# Altium PCB MODULE_DRIVER.PcbDoc (part 1 of 2)
Units mil, origin at the board's own origin, x right, y up, seen from the top; angles counter-clockwise.
Board outline 3897.64 x 6754.13 mil, 4 copper layers (TOP, GND, POWER, BOTTOM), stack 23.756 mil thick; 214 components, 85 nets, 571 pads, 350 vias.
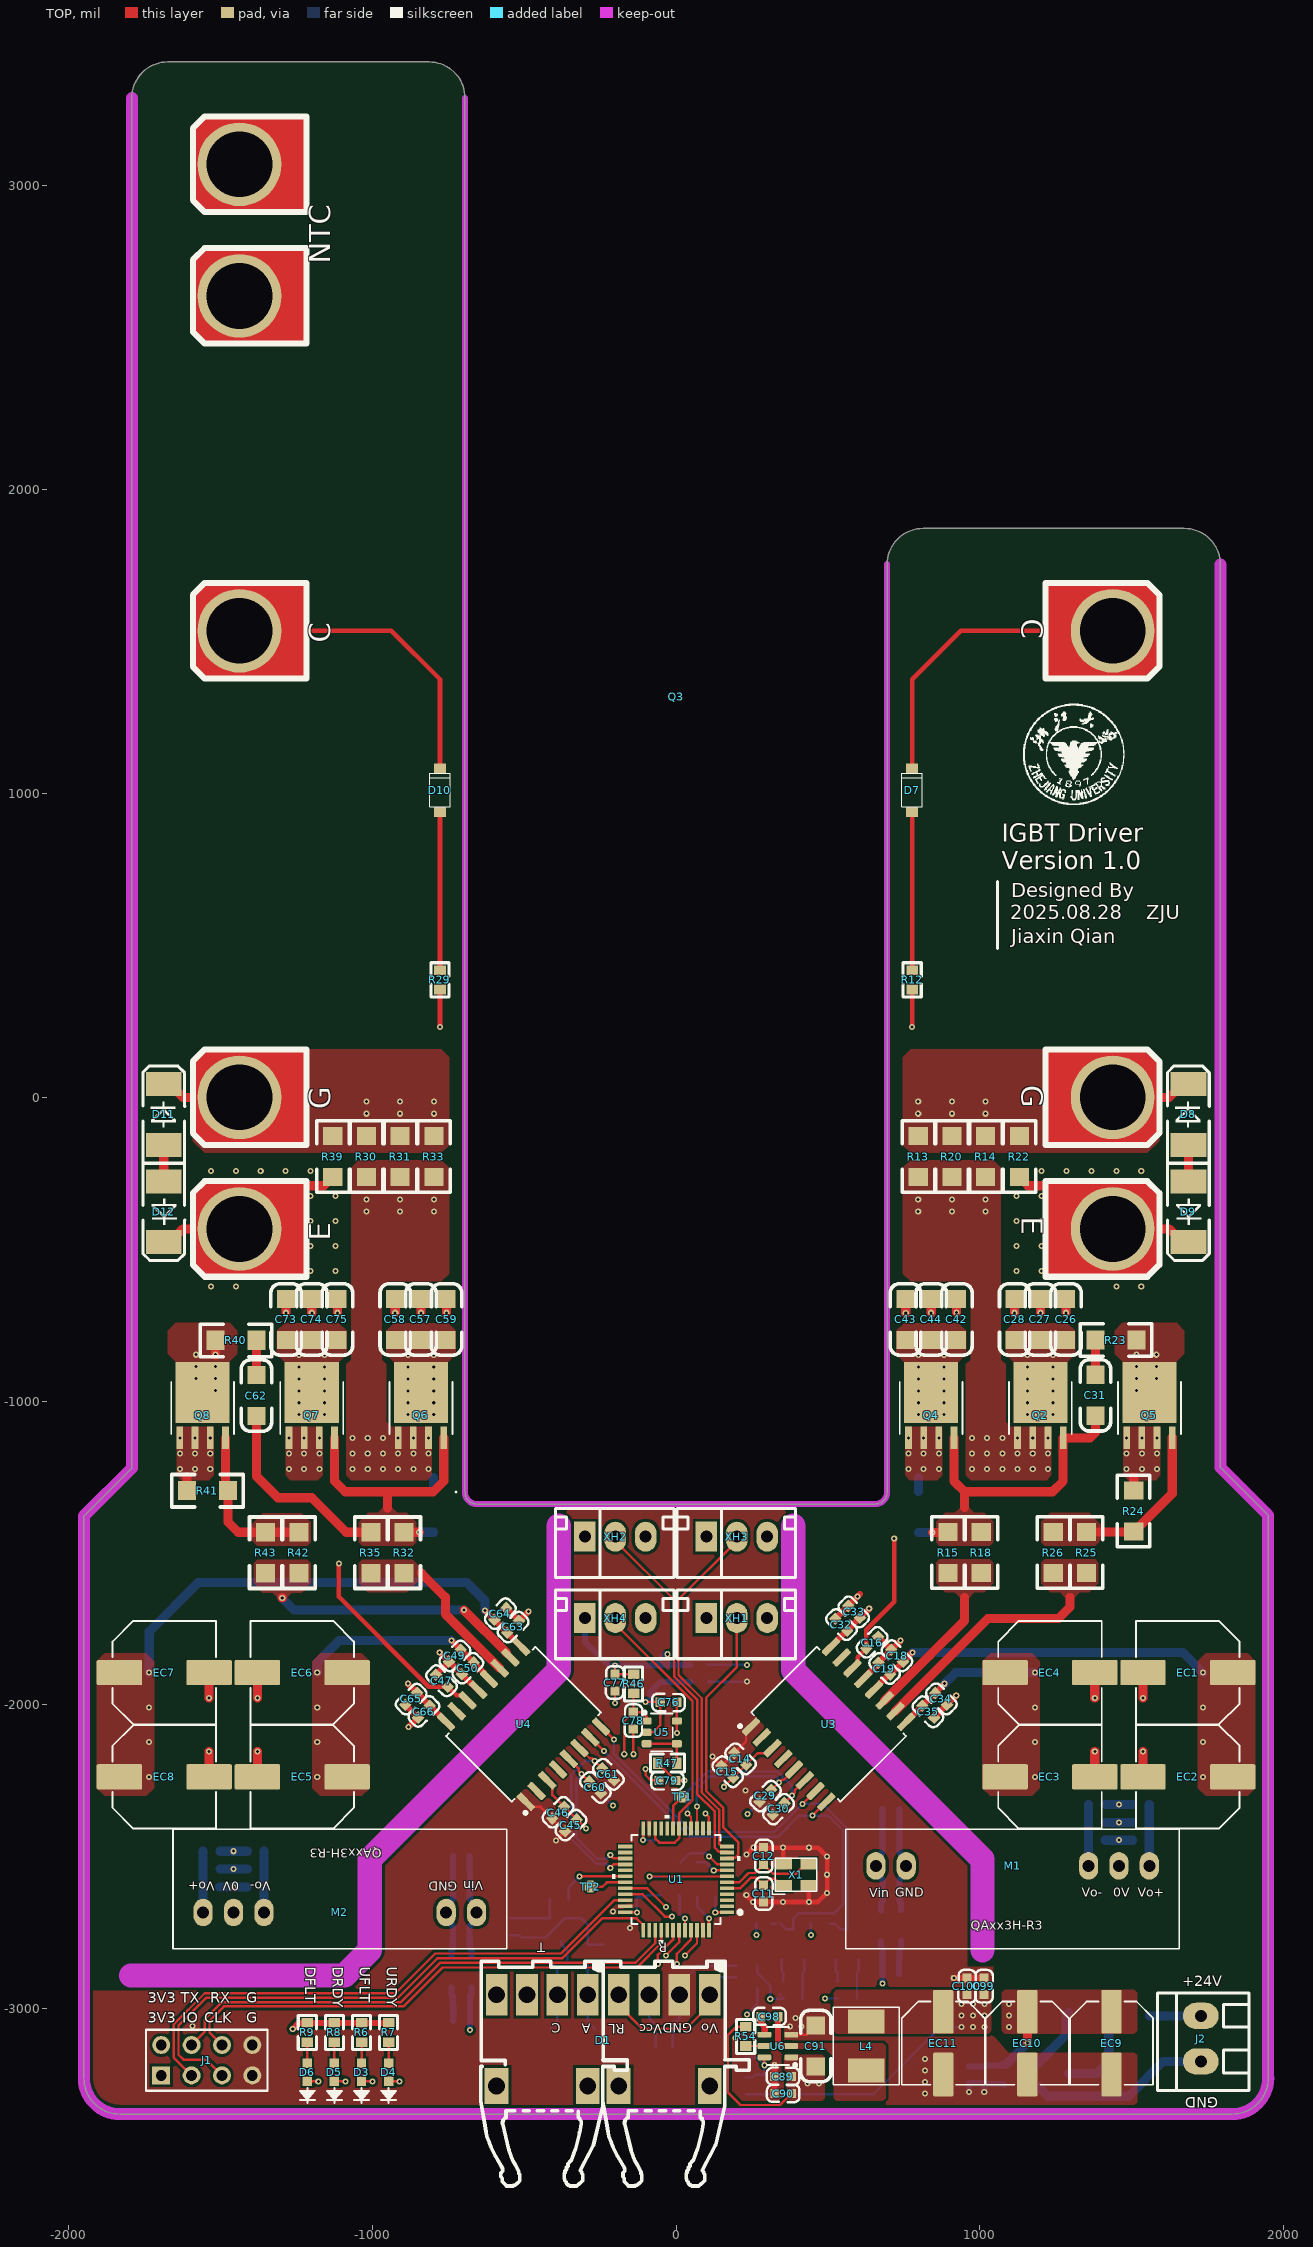
[diagram p0: TOP view]
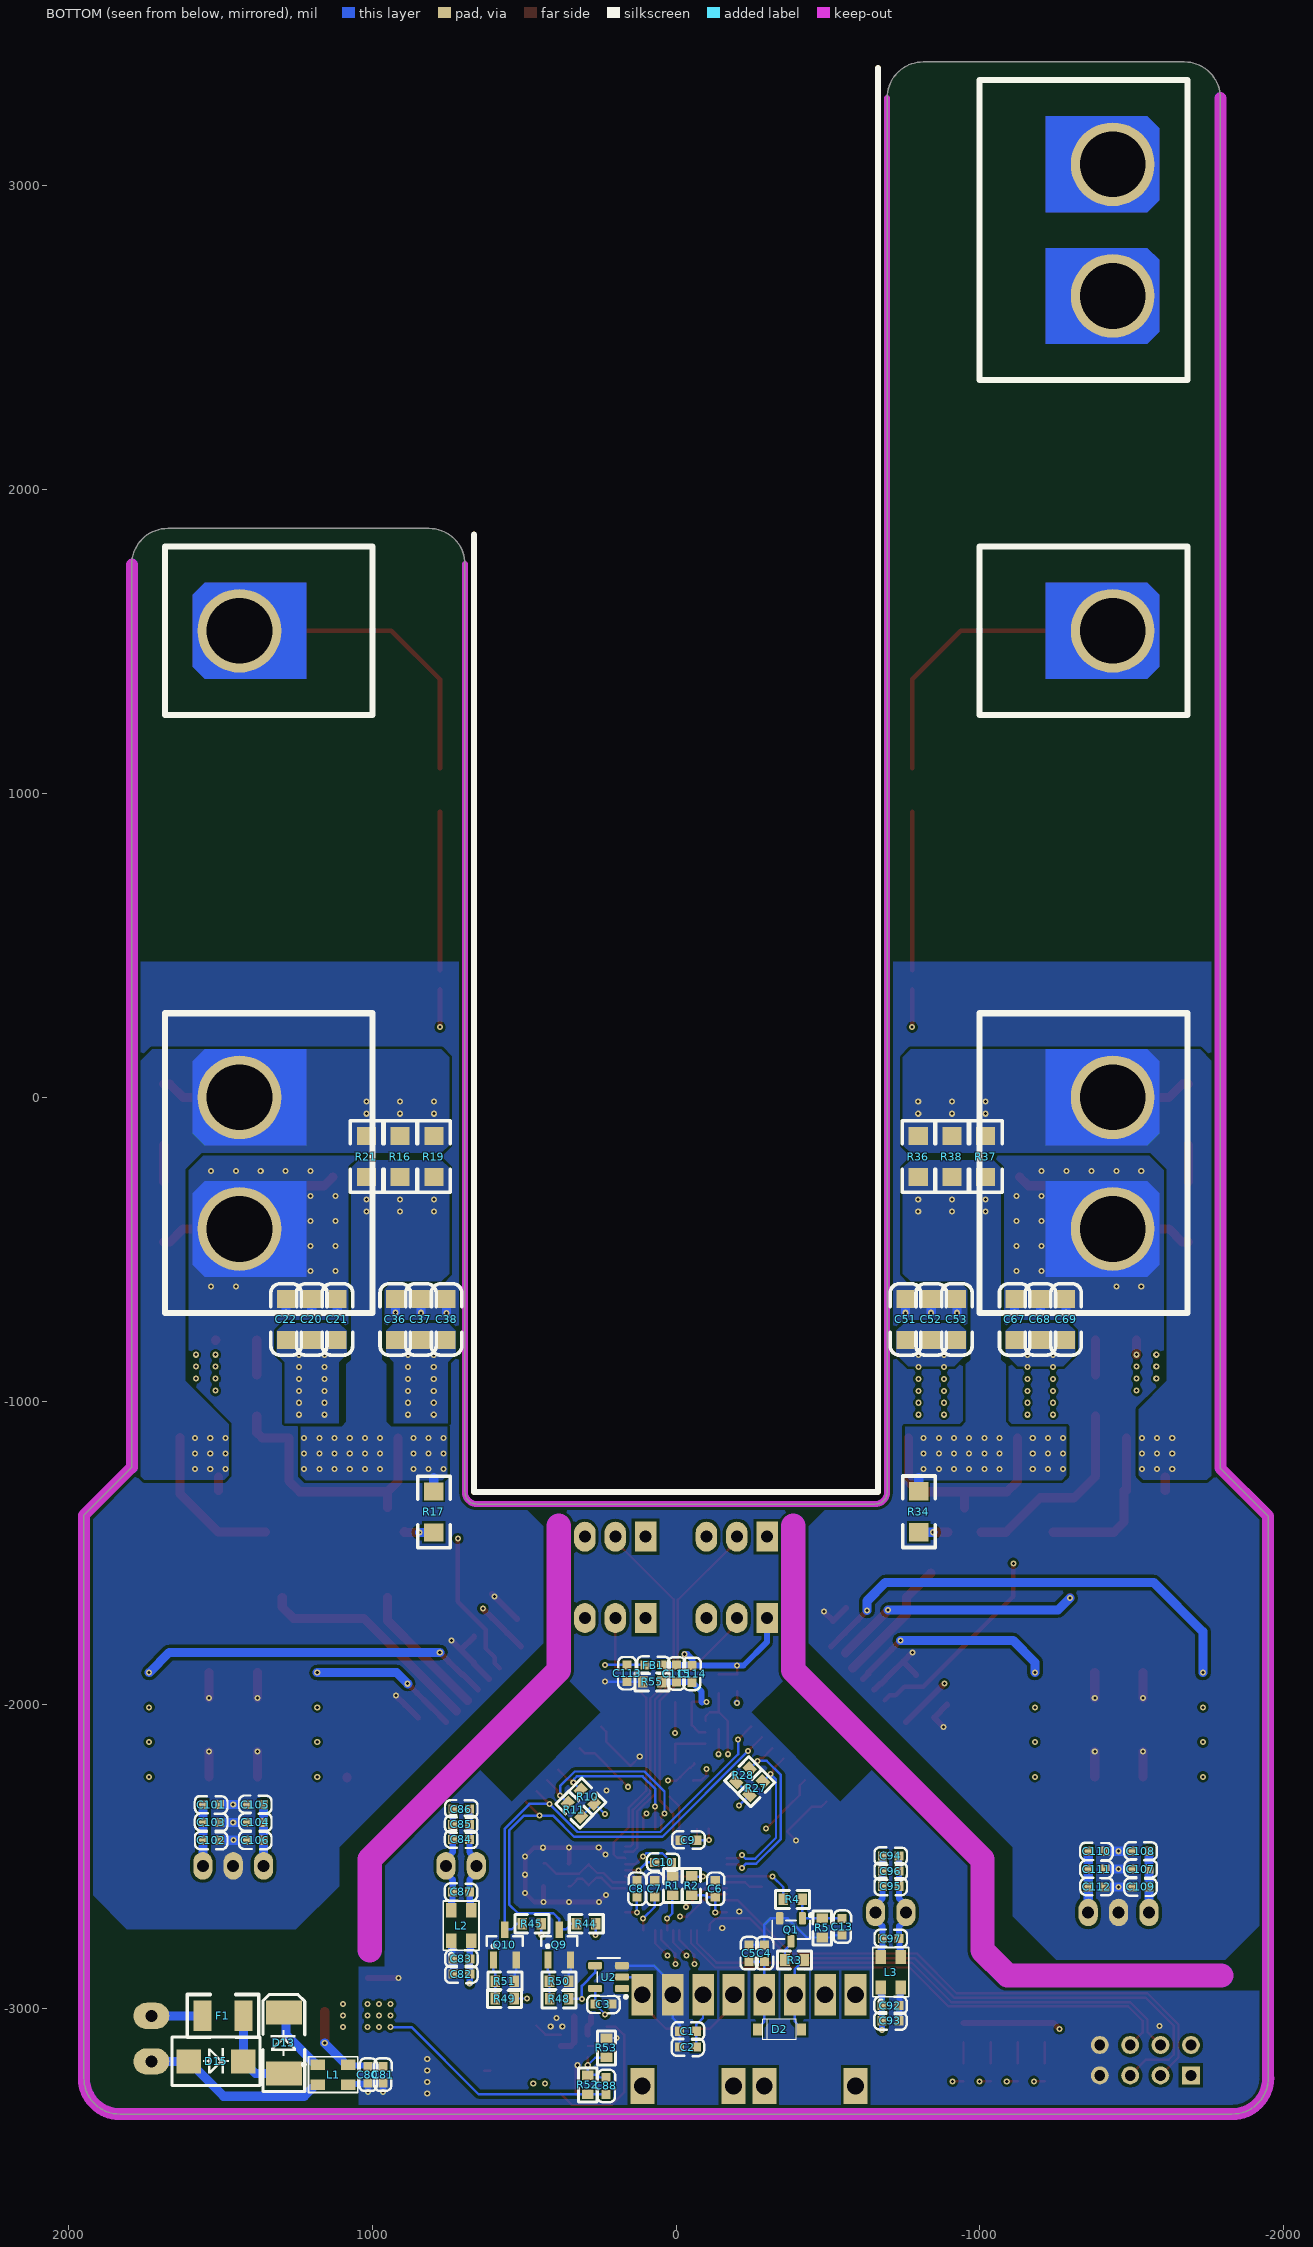
[diagram p1: BOTTOM view, seen from below]
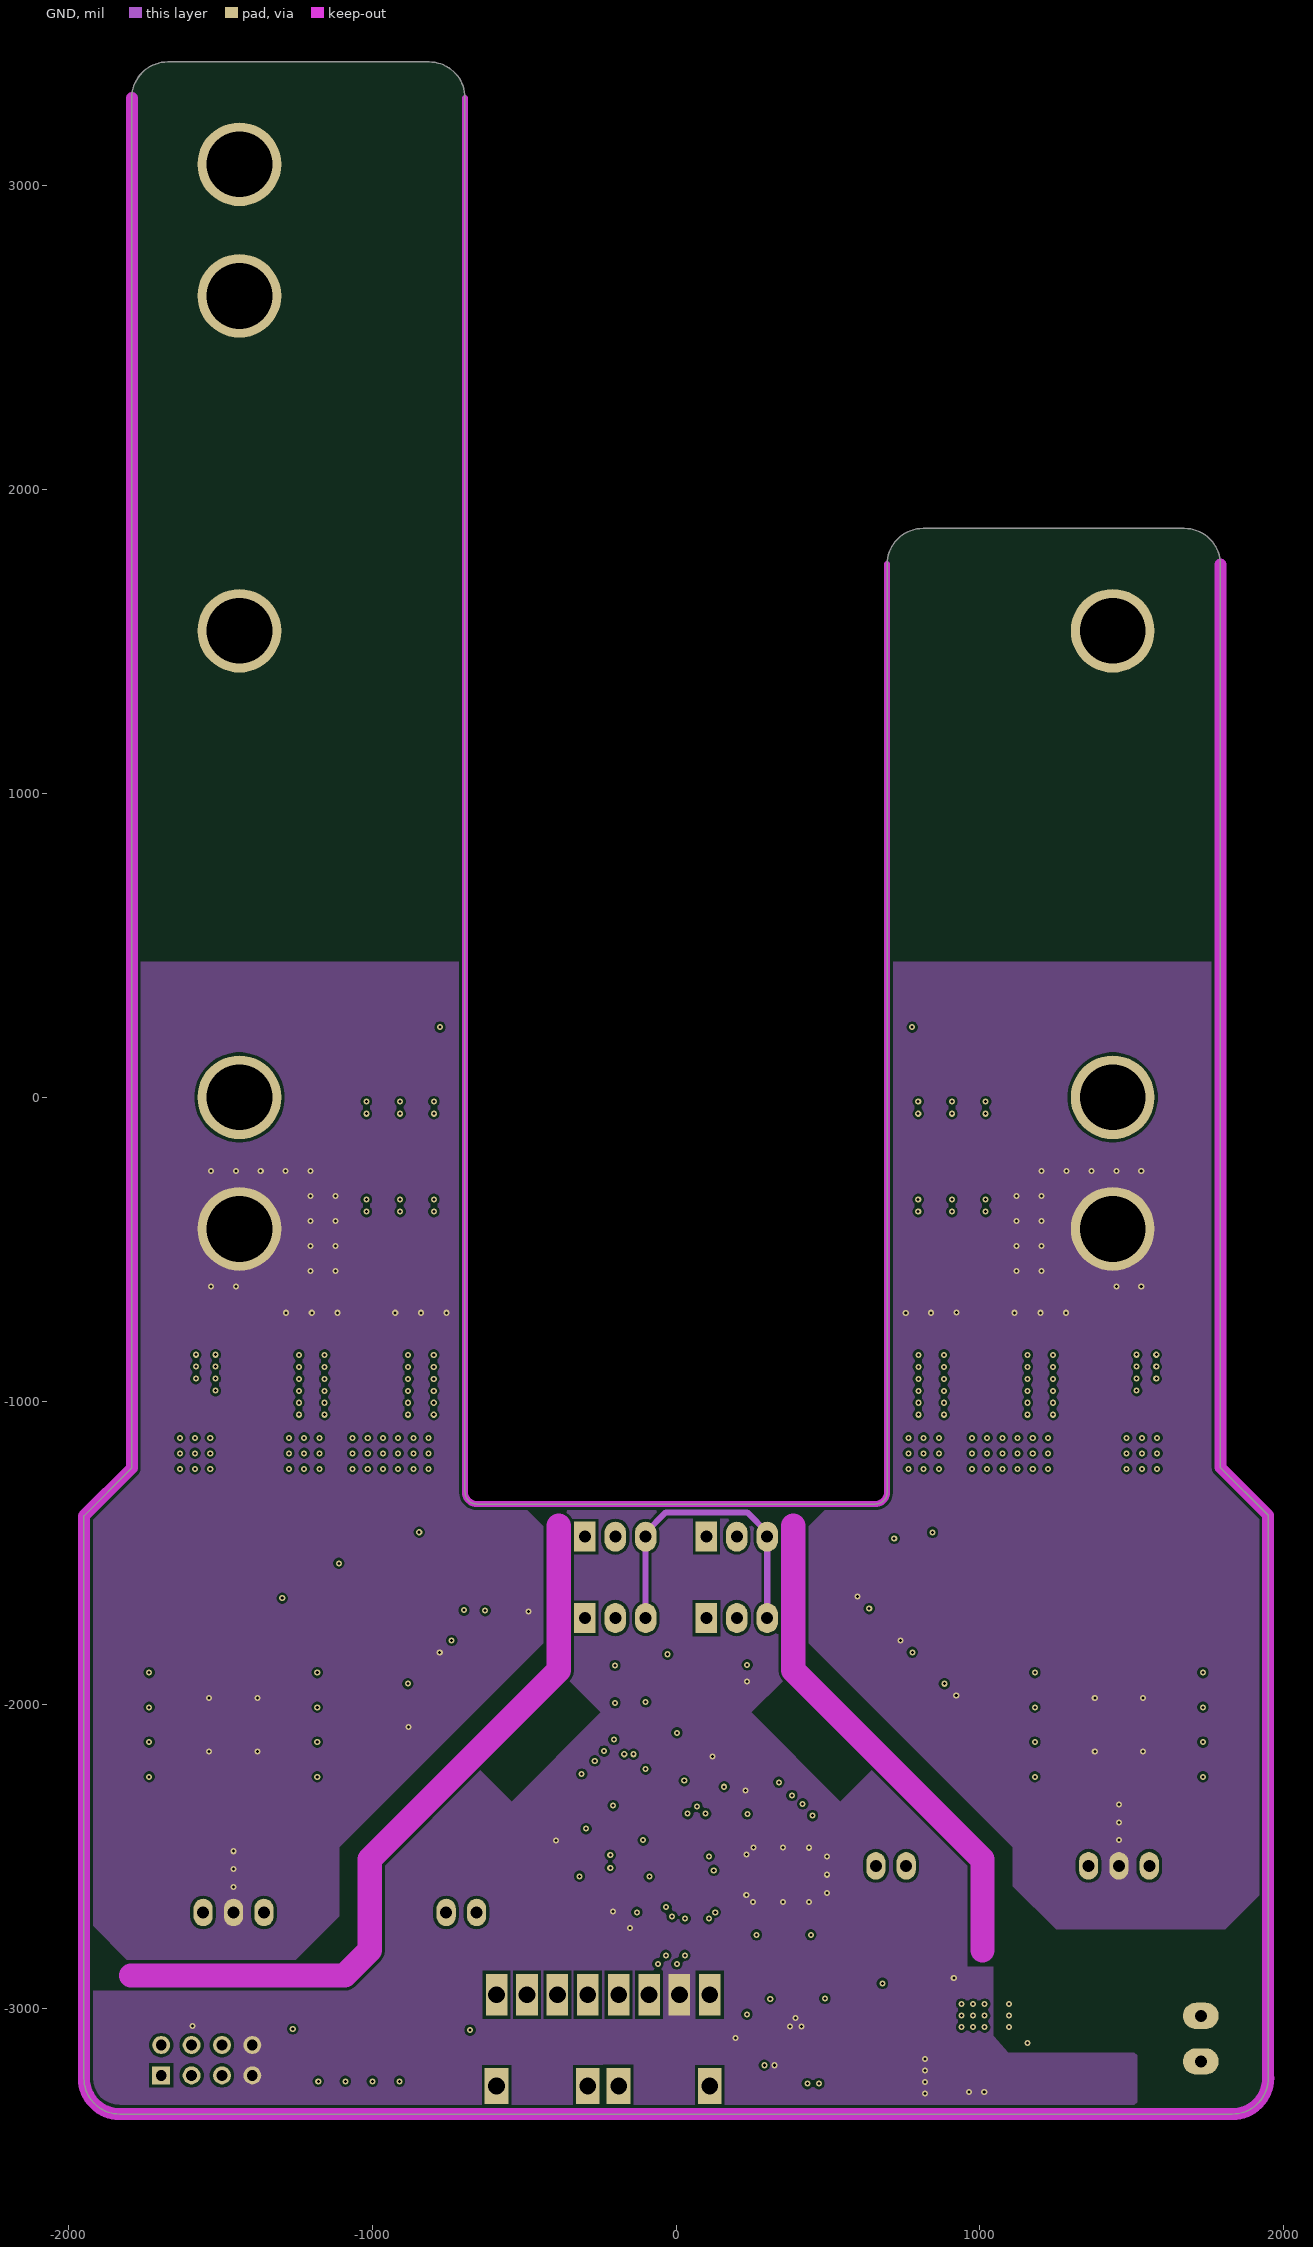
[diagram p2: GND]
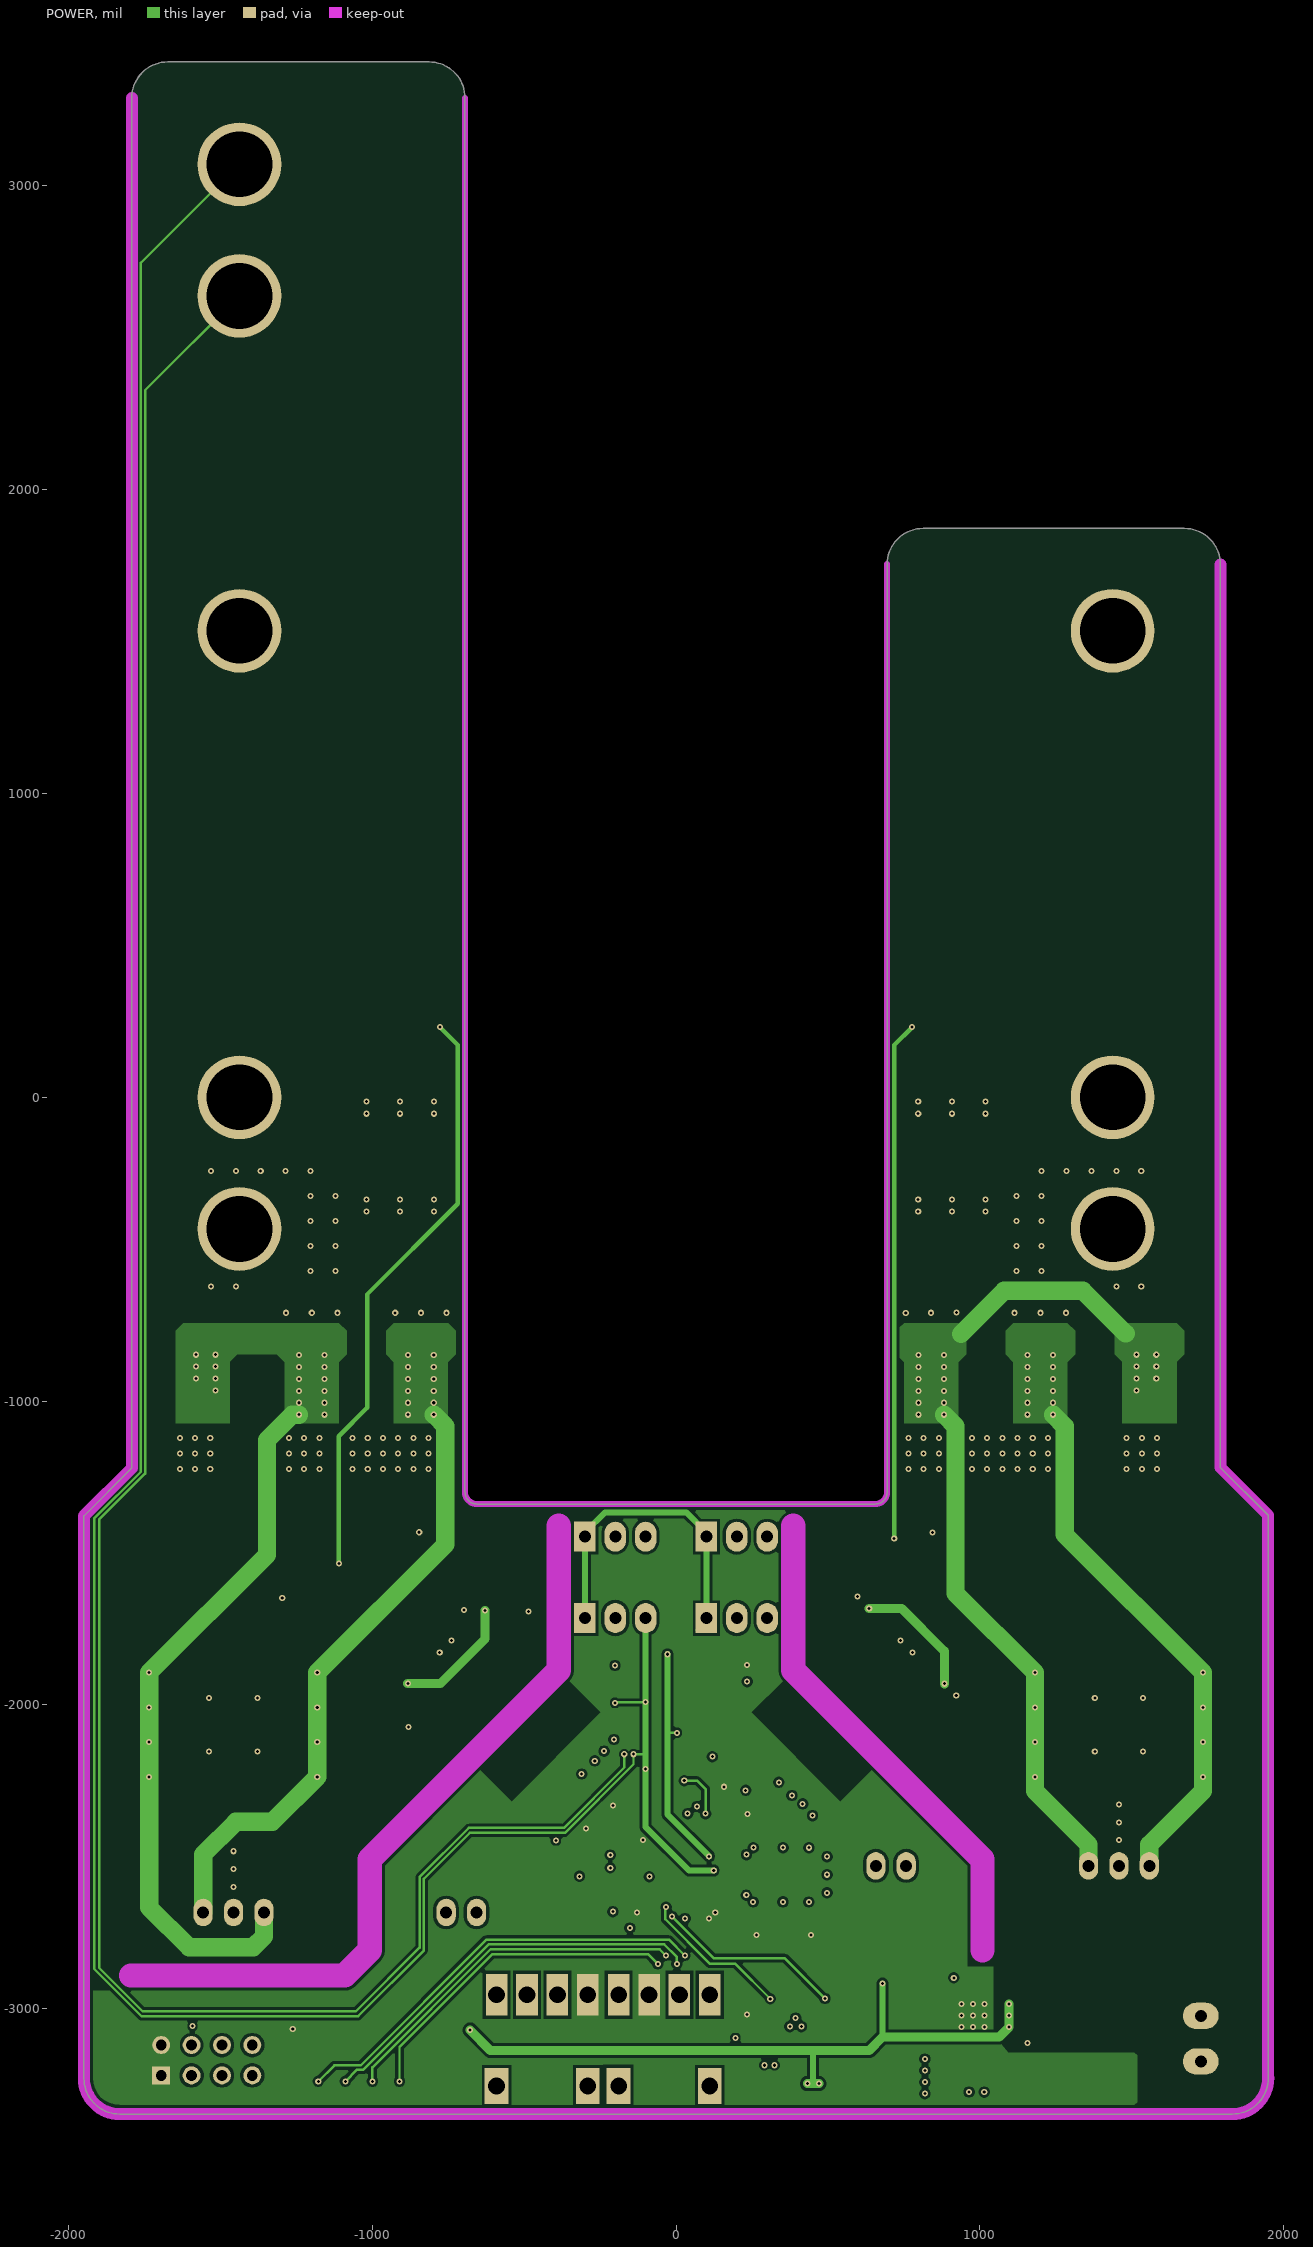
[diagram p3: POWER]

## Layer stack, top to bottom
Top Solder: solder mask 0.4, Solder Resist, Dk 3.5
TOP: signal copper 1.4
Dielectric 2: prepreg 2.8, PP-006, Dk 4.1
GND: signal copper 1.378
Dielectric 1: dielectric 12.6, FR-4, Dk 4.8
POWER: signal copper 1.378
Dielectric 3: prepreg 2.8, PP-006, Dk 4.1
BOTTOM: signal copper 1.4
Bottom Solder: solder mask 0.4, Solder Resist, Dk 3.5

## Board outline
-1948.82,-3228.35 ccw(c-1830.71,-3228.35) -1830.71,-3346.46 1830.71,-3346.46 ccw(c1830.71,-3228.35) 1948.82,-3228.35 1948.82,-1375.55 1791.34,-1218.07 1791.34,1754.37 ccw(c1673.23,1754.37) 1673.23,1872.48 812.87,1872.48 ccw(c812.87,1754.37) 694.76,1754.37 694.76,-1299.21 cw(c655.39,-1299.21) 655.39,-1338.58 -655.36,-1338.58 cw(c-655.36,-1299.21) -694.73,-1299.21 -694.73,3289.57 ccw(c-812.84,3289.57) -812.84,3407.68 -1673.23,3407.68 ccw(c-1673.23,3289.57) -1791.34,3289.57 -1791.34,-1220.47 -1948.82,-1377.95
cut-out: 365.12,-1906.32 978.72,-2519.92 978.72,-2807.69 ccw(c1008.27,-2807.69) 1037.81,-2807.69 1037.81,-2507.69 ccw(c1008.27,-2507.69) 1029.15,-2486.8 406.9,-1864.54 ccw(c386.01,-1885.43)
cut-out: -1037.81,-2807.69 -1037.81,-2507.69 cw(c-1008.27,-2507.69) -1029.15,-2486.8 -406.9,-1864.54 cw(c-386.01,-1885.43) -356.47,-1885.43 cw(c-386.01,-1885.43) -365.12,-1906.32 -978.72,-2519.92 -978.72,-2807.69 cw(c-1008.27,-2807.69)

## Design rules (kind name [scope] priority, off if disabled: settings)
Clearance [All] p1: gap=6 ignorepadtopadclearanceinfootprint=FALSE except(8: Via-Fill Via-Poly Via-Region; 10: Arc-Fill Arc-Poly Arc-Region Track-Fill Track-Poly Track-Region THPad-Fill THPad-Poly THPad-Region Fill-Fill Fill-Poly Fill-Region Poly-Poly Poly-Region Region-Region)
PlaneConnect [All] p1: planeconnectstyle=Direct reliefexpansion=20 reliefentries=4 reliefconductorwidth=10 reliefairgap=10
PolygonConnect [All] p1: connectstyle=Direct reliefconductorwidth=10 reliefentries=4 polygonreliefangle="90 Angle" airgapwidth=10
RoutingVias [All] p1: holewidth=10 width=20 viastyle="Through Hole" minholewidth=10 minwidth=20 maxholewidth=10 maxwidth=20
SolderMaskExpansion [All] p1: expansion=4 istentingtop=FALSE
SupplyNets "Schematic Supply Nets_10" [InNet('+15V_DN')] p1: voltage=0.000
SupplyNets "Schematic Supply Nets_9" [InNet('3V3')] p2: voltage=0.000
SupplyNets "Schematic Supply Nets_8" [InNet('A3V3')] p3: voltage=0.000
SupplyNets "Schematic Supply Nets_7" [InNet('-9V_UP')] p4: voltage=0.000
SupplyNets "Schematic Supply Nets_6" [InNet('GND_UP')] p5: voltage=0.000
SupplyNets "Schematic Supply Nets_5" [InNet('24V')] p6: voltage=0.000
SupplyNets "Schematic Supply Nets_4" [InNet('GND_DN')] p7: voltage=0.000
SupplyNets "Schematic Supply Nets_3" [InNet('GND')] p8: voltage=0.000
SupplyNets "Schematic Supply Nets_2" [InNet('+15V_UP')] p9: voltage=0.000
SupplyNets "Schematic Supply Nets_1" [InNet('-9V_DN')] p10: voltage=0.000
SupplyNets "Schematic Supply Nets" [InNet('AGND')] p11: voltage=0.000
Width [All] p1: maxlimit=60 minlimit=8 preferedwidth=8 toplayer_maxwidth=30 bottomlayer_maxwidth=30 minimp=50.000000 maximp=50.000000 favimp=50.000000
29 further rules are at their usual default settings.

## Classes and differential pairs
component class Designator: C14 C15 C16 C18 C19 C20 C21 C22 C26 C27 C28 C29 C30 C31 C32 C33 C34 C35 C36 C37 C38 C42 C43 C44 C45 C46 C47 C49 C50 C51 C52 C53 C57 C58 C59 C60 C61 C62 C63 C64 C65 C66 C67 C68 C69 C73 C74 C75 C76 C77 C78 C79 D7 D8 D9 D10 D11 D12 EC1 EC2 EC3 EC4 EC5 EC6 EC7 EC8 Q2 Q3 Q4 Q5 Q6 Q7 Q8 Q9 Q10 R10 R11 R12 R13 R14 R15 R16 R17 R18 R19 R20 R21 R22 R23 R24 R25 R26 R27 R28 R29 R30 R31 R32 R33 R34 R35 R36 R37 R38 R39 R40 R41 R42 R43 R44 R45 R46 R47 R48 R49 R50 R51 U3 U4 U5

## Components (designator, comment, footprint, x,y, rotation, side; value= is the part's Value field where it differs from the comment)
C1 "100nF/100V" 0603C -66.67,-3074.09 r0 bottom
C2 "1uF/50V" 0603C -11.24,-3125.39 r180 bottom
C3 "100nF/100V" 0603C 266.82,-2984.25 r180 bottom
C4 "100nF/100V" 0603C -290.25,-2844.57 r90 bottom
C5 "10uF/25V" 0603C -239.82,-2844.57 r90 bottom
C6 "100nF/100V" 0603C -128.63,-2632.48 r90 bottom
C7 "100nF/100V" 0603C 70.34,-2632.48 r90 bottom
C8 "100nF/100V" 0603C 129.34,-2632.48 r90 bottom
C9 "100nF/100V" 0603C -68.48,-2445.37 r0 bottom
C10 "100nF/100V" 0603C 14.77,-2518.35 r0 bottom
C11 "16pF/50V" 0603C 287.27,-2648.4 r90 top
C12 "16pF/50V" 0603C 287.63,-2524.75 r90 top
C13 "1nF/50V" 0603C -546.18,-2757.36 r90 bottom
C14 "100nF/100V" 0603C 230.76,-2197.08 r135 top
C15 "100nF/100V" 0603C 188.33,-2239.51 r135 top
C16 "150pF/50V" 0603C 665.28,-1775.19 r225 top
C18 "1uF/50V" 0603C 708.41,-1818.13 r315 top
C19 "100nF/100V" 0603C 704.77,-1899.84 r135 top
C20 "10uF/50V" 1206C 1198.93,-663.43 r270 bottom
C21 "10uF/50V" 1206C 1114.33,-663.43 r270 bottom
C22 "10uF/50V" 1206C 1283.52,-663.43 r270 bottom
C26 "100nF/100V" 1206C 1283.52,-663.43 r270 top
C27 "100nF/100V" 1206C 1198.93,-663.43 r270 top
C28 "100nF/100V" 1206C 1114.33,-663.43 r270 top
C29 "100nF/100V" 0603C 274.3,-2318.2 r45 top
C30 "100nF/100V" 0603C 317.48,-2361.38 r45 top
C31 "10nF/50V" 1206C 1380.11,-913.36 r270 top
C32 "100nF/100V" 0603C 562.8,-1755.48 r135 top
C33 "1uF/50V" 0603C 566.44,-1673.76 r315 top
C34 "1uF/50V" 0603C 891.51,-1999.83 r135 top
C35 "100nF/100V" 0603C 810.39,-2002.57 r315 top
C36 "10uF/50V" 1206C 924.33,-663.43 r270 bottom
C37 "10uF/50V" 1206C 839.74,-663.43 r270 bottom
C38 "10uF/50V" 1206C 755.15,-663.43 r270 bottom
C42 "100nF/100V" 1206C 924.33,-663.43 r270 top
C43 "100nF/100V" 1206C 755.15,-663.43 r270 top
C44 "100nF/100V" 1206C 839.74,-663.43 r270 top
C45 "100nF/100V" 0603C -325.96,-2377.14 r225 top
C46 "100nF/100V" 0603C -368.39,-2334.71 r225 top
C47 "150pF/50V" 0603C -790.27,-1900.19 r315 top
C49 "1uF/50V" 0603C -747.74,-1856.96 r45 top
C50 "100nF/100V" 0603C -665.48,-1860.55 r225 top
C51 "10uF/50V" 1206C -755.15,-663.42 r270 bottom
C52 "10uF/50V" 1206C -839.74,-663.42 r270 bottom
C53 "10uF/50V" 1206C -924.33,-663.42 r270 bottom
C57 "100nF/100V" 1206C -839.74,-663.42 r270 top
C58 "100nF/100V" 1206C -924.33,-663.42 r270 top
C59 "100nF/100V" 1206C -755.15,-663.42 r270 top
C60 "100nF/100V" 0603C -247.27,-2291.17 r135 top
C61 "100nF/100V" 0603C -204.09,-2247.99 r135 top
C62 "10nF/50V" 1206C -1380.91,-914.16 r270 top
C63 "100nF/100V" 0603C -556.23,-1762.05 r45 top
C64 "1uF/50V" 0603C -558.57,-1681.03 r225 top
C65 "1uF/50V" 0603C -891.71,-1999.03 r45 top
C66 "100nF/100V" 0603C -809.99,-2002.67 r225 top
C67 "10uF/50V" 1206C -1114.33,-663.42 r270 bottom
C68 "10uF/50V" 1206C -1198.93,-663.42 r270 bottom
C69 "10uF/50V" 1206C -1283.52,-663.42 r270 bottom
C73 "100nF/100V" 1206C -1283.52,-663.42 r270 top
C74 "100nF/100V" 1206C -1198.93,-663.42 r270 top
C75 "100nF/100V" 1206C -1114.33,-663.42 r270 top
C76 "100nF/100V" 0603C -52.41,-1990.65 r0 top
C77 "100nF/100V" 0603C -200.65,-1898.79 r270 top
C78 "100nF/100V" 0603C -141.36,-2079.21 r90 top
C79 "47pF/50V" 0603C -56.21,-2248.65 r0 top
C80 "100nF/100V" 0603C 1014.35,-3244.42 r90 bottom
C81 "1uF/50V" 0603C 963.65,-3189 r270 bottom
C82 "100nF/100V" 0603C 734.17,-2885.38 r180 bottom
C83 "1uF/50V" 0603C 678.75,-2836.09 r0 bottom
C84 "1uF/50V" 0603C 679.8,-2443.05 r0 bottom
C85 "1uF/50V" 0603C 679.59,-2393.41 r0 bottom
C86 "1uF/50V" 0603C 679.37,-2343.05 r0 bottom
C87 "100nF/100V" 0603C 735.16,-2614.93 r180 bottom
C88 "47pF/50V" 0603C 230.36,-3281.2 r90 bottom
C89 "1uF/50V" 0603C 379.5,-3223.35 r180 top
C90 "1uF/50V" 0603C 380.21,-3279.35 r180 top
C91 "100nF/100V" 1206C 460,-3189.9 r90 top
C92 "100nF/100V" 0603C -733.47,-2989.64 r0 bottom
C93 "1uF/50V" 0603C -678.05,-3038.93 r180 bottom
C94 "1uF/50V" 0603C -678.95,-2496.24 r180 bottom
C95 "1uF/50V" 0603C -678.95,-2596.24 r180 bottom
C96 "1uF/50V" 0603C -678.95,-2546.24 r180 bottom
C97 "100nF/100V" 0603C -734.16,-2769.18 r0 bottom
C98 "100nF/100V" 0603C 335.21,-3026.35 r180 top
C99 "100nF/100V" 0603C 1012.65,-2953.21 r90 top
C100 "1uF/50V" 0603C 956.65,-2953.21 r90 top
C101 "1uF/50V" 0603C 1557.69,-2327.38 r180 bottom
C102 "1uF/50V" 0603C 1557.48,-2445 r180 bottom
C103 "100nF/100V" 0603C 1502.27,-2386.72 r0 bottom
C104 "1uF/50V" 0603C 1357.27,-2386.72 r0 bottom
C105 "1uF/50V" 0603C 1357.27,-2328.09 r0 bottom
C106 "100nF/100V" 0603C 1412.69,-2444.65 r180 bottom
C107 "1uF/50V" 0603C -1556.69,-2540.27 r0 bottom
C108 "1uF/50V" 0603C -1556.69,-2481.64 r0 bottom
C109 "100nF/100V" 0603C -1501.27,-2598.19 r180 bottom
C110 "1uF/50V" 0603C -1356.27,-2480.93 r180 bottom
C111 "1uF/50V" 0603C -1356.27,-2539.56 r180 bottom
C112 "100nF/100V" 0603C -1411.69,-2598.9 r0 bottom
C113 "100nF/100V" 0603C 160.65,-1867.79 r270 bottom
C114 "10uF/25V" 0603C -53.35,-1869.79 r270 bottom
C115 "100nF/100V" 0603C -2.35,-1868.79 r270 bottom
D1 "HFBR-1521Z/HFBR-2521Z" HFBR_XX21Z_UNION -38.99,-3103.63 r180 top
D2 "B5819W" SOD-123 -410.6,-3067.74 r0 bottom
D3 "NCD0603R1" LED_LSQ976_OSR -1035.18,-3209.28 r90 top
D4 "NCD0603R1" LED_LSQ976_OSR -946.06,-3209.28 r90 top
D5 "NCD0603R1" LED_LSQ976_OSR -1124.3,-3209.28 r90 top
D6 "NCD0603R1" LED_LSQ976_OSR -1213.43,-3209.28 r90 top
D7 "H61" SOD-123 777,941 r90 top
D8 "SMAJ16A" SMA/DO-214AC 1686,-151.53 r90 top
D9 "SMAJ10A" SMA/DO-214AC 1686,-281.53 r270 top
D10 "H61" SOD-123 -777,941 r90 top
D11 "SMAJ16A" SMA/DO-214AC -1686,-151.54 r90 top
D12 "SMAJ10A" SMA/DO-214AC -1686,-281.53 r270 top
D13 "SSA34" SMA/DO-214AC 1291,-3207.43 r90 bottom
D15 "SMBJ26A" SMB/DO-214AA 1604,-3173.06 r180 bottom
EC1 "MA25V470M8x10" CAPAE830X1050L275X95N 1684.48,-1893.37 r180 top
EC2 "MA25V470M8x10" CAPAE830X1050L275X95N 1684.48,-2236.37 r180 top
EC3 "MA25V470M8x10" CAPAE830X1050L275X95N 1230.48,-2236.37 r0 top
EC4 "MA25V470M8x10" CAPAE830X1050L275X95N 1230.48,-1893.37 r0 top
EC5 "MA25V470M8x10" CAPAE830X1050L275X95N -1230.48,-2236.37 r180 top
EC6 "MA25V470M8x10" CAPAE830X1050L275X95N -1230.48,-1893.37 r180 top
EC7 "MA25V470M8x10" CAPAE830X1050L275X95N -1684.48,-1893.37 r0 top
EC8 "MA25V470M8x10" CAPAE830X1050L275X95N -1684.48,-2236.37 r0 top
EC9 "MA50V22M6X6" CAPAE660X650L275X70N 1433.28,-3112.8 r270 top
EC10 "MA50V22M6X6" CAPAE660X650L275X70N 1156.28,-3112.8 r270 top
EC11 "MA50V22M6X6" CAPAE660X650L275X70N 879.28,-3112.8 r270 top
F1 "JK-SMD1210-050-30V" FUSE-1210 1557,-3025.06 r180 bottom
FB1 "200R,1A" 0603 102.21,-1867.65 r180 bottom
J1 "Female HDR2X4" Fe-HDR2X4/2.54-S -1694.55,-3219.12 r0 top
J2 "KF128-2P" KF128-3.81-2P 1727,-3173.06 r90 top
L1 "SMW3225S102HTE" INDDFN4_320X250X240L65X80N 1129,-3216.74 r180 bottom value=10uH
L2 "SMW3225S102HTE" INDDFN4_320X250X240L65X80N 707.33,-2725.93 r90 bottom value=10uH
L3 "SMW3225S102HTE" INDDFN4_320X250X240L65X80N -706.63,-2879.48 r90 bottom value=10uH
L4 "10uH" L0530 626,-3122.4 r90 top
M1 "QA243H-1509R3" QAxx3H-R3 1107.48,-2529.35 r0 top
M2 "QA243H-1509R3" QAxx3H-R3 -1106.48,-2682.89 r180 top
Q1 "HL3400" SOT23-3 -378.47,-2739.94 r0 bottom
Q2 "PHPT60415NYX" LFPAK56_SOT669_NEX 1198.93,-1022.65 r0 top
Q3 "FF1800R17IP5" FF1800R17IP5 0,3622.05 r90 top locked
Q4 "PHPT60415PYX" LFPAK56_SOT669_NEX 839.74,-1022.65 r0 top
Q5 "PHPT60415PYX" LFPAK56_SOT669_NEX 1558.11,-1022.65 r0 top
Q6 "PHPT60415NYX" LFPAK56_SOT669_NEX -839.74,-1022.65 r0 top
Q7 "PHPT60415PYX" LFPAK56_SOT669_NEX -1198.93,-1022.65 r0 top
Q8 "PHPT60415PYX" LFPAK56_SOT669_NEX -1558.11,-1022.65 r0 top
Q9 "2N7002,215(ES)" SOT23 422,-2839 r180 bottom
Q10 "2N7002,215(ES)" SOT23 601,-2839 r180 bottom
R1 "4.7kR, 1%" 0603R 10.98,-2563.8 r270 bottom
R2 "4.7kR, 1%" 0603R -51,-2625.8 r90 bottom
R3 "25R, 1%" 0603R -421.46,-2839.36 r0 bottom
R4 "NC" 0603R -352.88,-2640 r180 bottom
R5 "4.7kR, 1%" 0603R -481.2,-2765.14 r90 bottom
R6 "150R, 1%" 0603R -1035.18,-3046.32 r270 top
R7 "150R, 1%" 0603R -946.06,-3046.32 r270 top
R8 "150R, 1%" 0603R -1124.3,-3046.32 r270 top
R9 "150R, 1%" 0603R -1213.43,-3046.32 r270 top
R10 "4.7kR,1%,0.1W" 0603R 313.59,-2279.41 r225 bottom
R11 "4.7kR,1%,0.1W" 0603R 356.77,-2322.59 r225 bottom
R12 "4.7kR,1%,0.1W" 0603R 777,417.92 r270 top
R13 "9.1R,1%,0.25W" 1206R 797,-262.48 r90 top
R14 "9.1R,1%,0.25W" 1206R 1019,-262.48 r90 top
R15 "130R,1%,0.25W" 1206R 895.07,-1565.7 r90 top
R16 "9.1R,1%,0.25W" 1206R 908,-262.48 r90 bottom
R17 "100R,1%,0.25W" 1206R 797.44,-1432 r90 bottom
R18 "130R,1%,0.25W" 1206R 1004.41,-1565.7 r90 top
R19 "9.1R,1%,0.25W" 1206R 797,-262.48 r90 bottom
R20 "9.1R,1%,0.25W" 1206R 908,-262.48 r90 top
R21 "9.1R,1%,0.25W" 1206R 1019,-262.48 r90 bottom
R22 "10kR,1%,0.25W" 1206R 1130,-262.48 r90 top
R23 "15R,1%,0.25W" 1206R 1515.11,-798.89 r180 top
R24 "10kR,1%,0.25W" 1206R 1506.37,-1294.22 r270 top
R25 "130R,1%,0.25W" 1206R 1350.85,-1565.7 r90 top
R26 "130R,1%,0.25W" 1206R 1241.52,-1565.7 r90 top
R27 "4.7kR,1%,0.1W" 0603R -286.06,-2251.88 r315 bottom
R28 "4.7kR,1%,0.1W" 0603R -242.88,-2208.7 r315 bottom
R29 "4.7kR,1%,0.1W" 0603R -777,417.92 r270 top
R30 "9.1R,1%,0.25W" 1206R -1019,-262.48 r90 top
R31 "9.1R,1%,0.25W" 1206R -908,-262.48 r90 top
R32 "130R,1%,0.25W" 1206R -895.07,-1566.44 r90 top
R33 "9.1R,1%,0.25W" 1206R -797,-262.48 r90 top
R34 "100R,1%,0.25W" 1206R -798.74,-1431.44 r90 bottom
R35 "130R,1%,0.25W" 1206R -1004.41,-1566.44 r90 top
R36 "9.1R,1%,0.25W" 1206R -797,-262.48 r90 bottom
R37 "9.1R,1%,0.25W" 1206R -1019,-262.48 r90 bottom
R38 "9.1R,1%,0.25W" 1206R -908,-262.48 r90 bottom
R39 "10kR,1%,0.25W" 1206R -1130,-262.48 r90 top
R40 "15R,1%,0.25W" 1206R -1515.91,-799.69 r0 top
R41 "10kR,1%,0.25W" 1206R -1609.85,-1294.22 r0 top
R42 "130R,1%,0.25W" 1206R -1241.52,-1566.44 r90 top
R43 "130R,1%,0.25W" 1206R -1350.85,-1566.44 r90 top
R44 "51R,1%,0.1W" 0603R 264.61,-2720 r0 bottom
R45 "51R,1%,0.1W" 0603R 443.61,-2720 r0 bottom
R46 "1kR,0.1%,0.1W" 0603R -140,-1961.99 r90 top
R47 "10R,1%,0.1W" 0603R 2.8,-2191 r180 top
R48 "10R,1%,0.1W" 0603R 415.6,-2967 r180 bottom
R49 "10R,1%,0.1W" 0603R 595.59,-2966.01 r180 bottom
R50 "4.7kR,1%,0.1W" 0603R 353.6,-2909 r0 bottom
R51 "4.7kR,1%,0.1W" 0603R 532.6,-2909 r0 bottom
R52 "68kR,1%" 0603R 290.71,-3280.99 r90 bottom
R53 "15kR,1%" 0603R 229,-3159.8 r90 bottom
R54 "470kR,1%" 0603R 229,-3059.41 r270 top
R55 "0R, 1%" 0603R 109.99,-1924 r180 bottom
TP1 "Test Point" TP 21,-2302 r0 top
TP2 "Test Point" TP -282,-2598 r90 top
U1 "STM32F302C8T6" LQFP48-7x7mm 0,-2574 r180 top
U2 "SN74LVC1G14DBVR" SOT23-5 222.31,-2895.4 r90 bottom
U3 "NSI68515UC" SOIC16P127_1030X1030X265L70X39N 502.08,-2063.39 r315 top
U4 "NSI68515UC" SOIC16P127_1030X1030X265L70X39N -502.07,-2063.39 r45 top
U5 "LMV321-TR" SOT23-5P95_292X280X125L45X40N -47,-2090 r270 top
U6 "HI9001" SOT23-6 335,-3122.4 r90 top
X1 "DSX321G-16M" SMD3225-4 394.98,-2558.97 r0 top
XH1 "XH3" XH3/2.54mm/180 100.02,-1714 r0 top
XH2 "XH3" XH3/2.54mm/180 -299.98,-1446 r0 top
XH3 "XH3" XH3/2.54mm/180 100.02,-1446 r0 top
XH4 "XH3" XH3/2.54mm/180 -299.98,-1714 r0 top

## Footprints (in the part's own frame and the unit in brackets; to place one, negate y for a bottom-side part, rotate by r counter-clockwise, add the part's x,y. Pads: shape width x height; smd on the part's side, far side on the other; paste and mask are expansions set on the pad)
0603 [mil]
  rect 30x30 smd: 1(0.21,-0.35) 2(55.21,-1.35)
  silkscreen extent -26,-30 81,28, body extent -1,-15 62,16, height 12
0603C [mil]
  rect 30x30 smd: 1(0.21,-0.35) 2(55.21,-0.35)
  silkscreen extent -26,-30 81,28, body extent -1,-16 61,15, height 12
0603R [mm]
  rect 0.8x0.965 smd: 1(0,0) 2(1.6,0)
  silkscreen extent -0.63,-0.76 2.21,0.76, body extent -0.04,-0.41 1.56,0.41, height 0.45
1206C [mil]
  rect 60x60 smd: 1(0,0) 2(135,0)
  silkscreen extent -50,-50 185,50, body extent 2,-31 128,31, height 39
1206R [mil]
  rect 60x62.99 smd: 1(0,0) 2(135,0)
  silkscreen extent -50,-54 185,53, body extent 7,-31 133,31, height 24
CAPAE660X650L275X70N [mm] "Capacitor, Aluminum Electrolytic; 6.60 mm L X 6.60 mm W X 6.50 mm H body"
  rrect12% 3.65x1.7 smd: 1(-2.625,0) 2(2.625,0)
  silkscreen extent -3.47,-3.47 3.47,3.47, body extent -3.65,-3.3 3.65,3.3, height 6.5
CAPAE830X1050L275X95N [mm] "Capacitor, Aluminum Electrolytic; 8.30 mm L X 8.30 mm W X 10.50 mm H body"
  rrect10% 3.8x2.1 smd: 1(-3.75,0) 2(3.75,0)
  silkscreen extent -4.33,-4.33 4.33,4.33, body extent -4.7,-4.15 4.7,4.15, height 10.5
Fe-HDR2X4/2.54-S [mm] "Connector; Header; 4x2 Position"
  rect 1.5x1.5 hole 0.9: 1(0,0)
  round 1.5 hole 0.9: 2(0,2.54) 3(2.54,0) 4(2.54,2.54) 5(5.08,0) 6(5.08,2.54) 7(7.62,0) 8(7.62,2.54)
  silkscreen extent -1.27,-1.27 8.89,3.81, body extent -1.27,-1.23 9.14,3.77, height 8.5
FF1800R17IP5 [mm]
  round 7 hole 5.5: 1(-92,36.5) 2(-103,36.5) 3(-103,-36.5) 4(-92,-36.5) 5(-53,-36.5) 6(-14,36.5) 7(-25,36.5) 8(-53,36.5)
  TOP region: -49,39.386 -49,30.9 -57,30.9 -57,39.386 -56,40.386 -50,40.386
  TOP region: -88,39.386 -88,30.9 -96,30.9 -96,39.386 -95,40.386 -89,40.386
  TOP region: -99,-39.386 -99,-30.9 -107,-30.9 -107,-39.386 -106,-40.386 -100,-40.386
  TOP region: -88,-39.386 -88,-30.9 -96,-30.9 -96,-39.386 -95,-40.386 -89,-40.386
  TOP region: -49,-39.386 -49,-30.9 -57,-30.9 -57,-39.386 -56,-40.386 -50,-40.386
  TOP region: -10,39.386 -10,30.9 -18,30.9 -18,39.386 -17,40.386 -11,40.386
  TOP region: -21,39.386 -21,30.9 -29,30.9 -29,39.386 -28,40.386 -22,40.386
  TOP region: -99,39.386 -99,30.9 -107,30.9 -107,39.386 -106,40.386 -100,40.386
  BOTTOM region: -99,-39.386 -99,-30.9 -107,-30.9 -107,-39.386 -106,-40.386 -100,-40.386
  BOTTOM region: -88,-39.386 -88,-30.9 -96,-30.9 -96,-39.386 -95,-40.386 -89,-40.386
  BOTTOM region: -49,-39.386 -49,-30.9 -57,-30.9 -57,-39.386 -56,-40.386 -50,-40.386
  BOTTOM region: -10,39.386 -10,30.9 -18,30.9 -18,39.386 -17,40.386 -11,40.386
  BOTTOM region: -21,39.386 -21,30.9 -29,30.9 -29,39.386 -28,40.386 -22,40.386
  BOTTOM region: -49,39.386 -49,30.9 -57,30.9 -57,39.386 -56,40.386 -50,40.386
  BOTTOM region: -99,39.386 -99,30.9 -107,30.9 -107,39.386 -106,40.386 -100,40.386
  BOTTOM region: -88,39.386 -88,30.9 -96,30.9 -96,39.386 -95,40.386 -89,40.386
  silkscreen extent -107,-40.4 -10,40.4, body extent -124.97,-45.26 125.08,43.74, height 12.15
FUSE-1210 [mil]
  rect 60x100 smd: 1(-2,2) 2(133,2)
  silkscreen extent -52,-68 183,72, body extent 8,-49 134,53, height 27
HFBR_XX21Z_UNION [mil]
  rect 70.9x137.8 hole 55.2: 1(-150,-150) 2(-50,-150) 3(50,-150) 4(150,-150) 5(251.61,-150) 6(351.61,-150) 7(451.61,-150) 8(551.61,-150)
  rect 78.7x118.1 hole 55.2: 8(-150,150) 8(150,150) 8(251.61,150) 8(551.61,150)
  silkscreen extent -280,-260 603,480, body extent -280,-257 602,483, height 300
INDDFN4_320X250X240L65X80N [mm] "Inductor, Dual Flat No-Lead (DFN) 4 pins, 2.55 mm pitch; 3.20 mm L X 2.50 mm W X 2.40 mm H body"
  rect 1.2x0.87 smd: 1(-1.275,0.841) 2(-1.275,-0.841) 3(1.275,-0.841) 4(1.275,0.841)
  silkscreen extent -2.56,-1.5 2.06,1.5, body extent -1.6,-1.25 1.6,1.25, height 2.4
KF128-3.81-2P [mm] "螺钉式接线端子，脚距3.81mm"
  oval 2.2x3 hole 1: 1(0,0) 2(3.81,0)
  silkscreen extent -2.41,-4.04 5.72,3.63, body extent -2.41,-3.83 5.71,3.57, height 8.55
L0530 [mm] "Diode, Dual Flat No-Lead, 2 pin; 1.00 mm L X 0.60 mm W X 0.50 mm H body"
  rect 2.012x3.015 smd: 1(-2.05,0) 2(2.05,0)
  silkscreen extent -3.24,-2.76 3.24,2.76, body extent -3,-2.6 3,2.6, height 3
LED_LSQ976_OSR [mil]
  rect 31x31 smd paste+0 mask+0: 1(-29.5,0) 2(29.5,0)
  TOP keep-out region: -8,-14.5 -8,14.5 8,14.5 8,-14.5
  silkscreen extent -101,-25 -51,25, body extent -31,-17 31,17, height 33
LFPAK56_SOT669_NEX [mil]
  rect 22x73 smd paste+0 mask+0: 1(-75,-98) 2(-25,-98) 3(25,-98) 4(75,-98)
  rect 178x201 smd paste+0 mask+0: 5(0,51)
  silkscreen extent -104,-86 104,86, body extent -99,-113 99,131, height 43
LQFP48-7x7mm [mil]
  rect 47x12 smd paste+0 mask+0: 1(-167.32,108.27) 2(-167.32,88.58) 3(-167.32,68.9) 4(-167.32,49.21) 5(-167.32,29.53) 6(-167.32,9.84) 7(-167.32,-9.84) 8(-167.32,-29.53) 9(-167.32,-49.21) 10(-167.32,-68.9) 11(-167.32,-88.58) 12(-167.32,-108.27) 25(167.32,-108.27) 26(167.32,-88.58) 27(167.32,-68.9) 28(167.32,-49.21) 29(167.32,-29.53) 30(167.32,-9.84) 31(167.32,9.84) 32(167.32,29.53) 33(167.32,49.21) 34(167.32,68.9) 35(167.32,88.58) 36(167.32,108.27)
  rect 12x47 smd paste+0 mask+0: 13(-108.27,-167.32) 14(-88.58,-167.32) 15(-68.9,-167.32) 16(-49.21,-167.32) 17(-29.53,-167.32) 18(-9.84,-167.32) 19(9.84,-167.32) 20(29.53,-167.32) 21(49.21,-167.32) 22(68.9,-167.32) 23(88.58,-167.32) 24(108.27,-167.32) 37(108.27,167.32) 38(88.58,167.32) 39(68.9,167.32) 40(49.21,167.32) 41(29.53,167.32) 42(9.84,167.32) 43(-9.84,167.32) 44(-29.53,167.32) 45(-49.21,167.32) 46(-68.9,167.32) 47(-88.58,167.32) 48(-108.27,167.32)
  silkscreen extent -217,-211 211,211, body extent -177,-177 177,177, height 63
QAxx3H-R3 [mm] "(V1)"
  oval 1.6x2.3 hole 1: 1(-11.43,0) 2(-8.89,0) 8(6.35,0) 9(8.89,0) 10(11.43,0)
  silkscreen extent -13.95,-6.95 13.95,3.05, body extent -13.7,-6.81 13.7,2.69, height 12.88
SMA/DO-214AC [mm] "塑封二极管"
  rect 2x3 smd: A(-0.127,0) K(4.953,0)
  silkscreen extent -1.63,-1.75 6.48,1.75, body extent 0.11,-1.35 4.71,1.35, height 2.4
SMB/DO-214AA [mil] "塑封二极管"
  rect 80x80 smd: A(0,0) K(180,0)
  silkscreen extent -55,-80 235,80, body extent -20,-79 200,75, height 98
SMD3225-4 [mm] "Diode, Dual Flat No-Lead, 0.75 mm Pitch, 4 pin; 1.20 mm L X 0.775 mm W X 0.40 mm H body"
  rect 1.4x1 smd: 1(-1.05,-0.95) 2(1.05,-0.95) 3(1.05,0.95) 4(-1.05,0.95)
  silkscreen extent -1.98,-1.62 1.74,1.38, body extent -1.6,-1.25 1.6,1.25, height 0.9
SOD-123 [mm] "塑封二极管"
  rect 0.8x1 smd: A(-0.051,0) K(3.607,0)
  silkscreen extent 0.38,-0.85 3.18,0.85, body extent -0.12,-0.89 3.73,0.81, height 1.43
SOIC16P127_1030X1030X265L70X39N [mm] "Small Outline IC (SOIC), 1.27 mm pitch; 16 pin, 10.30 mm L X 7.50 mm W X 2.65 mm H body"
  rrect36% 0.55x1.75 smd: 1(-4.445,-4.725) 2(-3.175,-4.725) 3(-1.905,-4.725) 4(-0.635,-4.725) 5(0.635,-4.725) 6(1.905,-4.725) 7(3.175,-4.725) 8(4.445,-4.725) 9(4.445,4.725) 10(3.175,4.725) 11(1.905,4.725) 12(0.635,4.725) 13(-0.635,4.725) 14(-1.905,4.725) 15(-3.175,4.725) 16(-4.445,4.725)
  silkscreen extent -5.28,-5.47 5.28,3.88, body extent -5.15,-5.15 5.15,5.15, height 2.65
SOT23 [mm]
  rect 0.6x1.4 smd: 1(0,0) 2(0.95,2.514) 3(1.9,0)
  silkscreen extent -0.55,1.02 2.45,1.97, body extent -0.56,0.22 2.44,2.62, height 1.05
SOT23-3 [mm] "Small Outline Transistor, SOT-23 Type, 0.95 mm pitch; 3 pin, 2.90 mm L X 1.30 mm W X 1.15 mm H body"
  rrect33% 0.6x1.03 smd: 1(-0.95,-0.96) 2(0.95,-0.96) 3(0,0.96)
  silkscreen extent -1.77,-1.35 1.58,0.77, body extent -1.45,-1.2 1.45,1.2, height 1.15
SOT23-5 [mm] "Small Outline Transistor, SOT-23 Type, 0.95 mm pitch; 5 pin, 2.90 mm L X 1.60 mm W X 1.45 mm H body"
  rrect33% 0.6x1.15 smd: 1(-0.95,-1.125) 2(0,-1.125) 3(0.95,-1.125) 4(0.95,1.125) 5(-0.95,1.125)
  silkscreen extent -1.77,-1.57 1.6,0.95, body extent -1.45,-1.4 1.45,1.4, height 1.45
SOT23-5P95_292X280X125L45X40N [mm] "Small Outline Transistor, SOT-23 Type, 0.95 mm pitch; 5 pin, 2.92 mm L X 1.60 mm W X 1.25 mm H body"
  rrect33% 0.6x0.82 smd: 1(-0.95,-1.265) 2(0,-1.265) 3(0.95,-1.265) 4(0.95,1.265) 5(-0.95,1.265)
  silkscreen extent -1.77,-1.55 1.59,0.92, body extent -1.46,-1.4 1.46,1.4, height 1.25
SOT23-6 [mm] "Small Outline Transistor, SOT-23 Type, 0.95 mm pitch; 6 pin, 2.92 mm L X 1.60 mm W X 1.25 mm H body"
  rrect42% 0.48x1.15 smd: 1(-0.95,-1.125) 2(0,-1.125) 3(0.95,-1.125) 4(0.95,1.125) 5(0,1.125) 6(-0.95,1.125)
  silkscreen extent -1.71,-1.58 1.59,0.92, body extent -1.46,-1.4 1.46,1.4, height 1.25
TP [mm]
  oct 1x1 smd paste-2539.97: 1(0,0)
XH3/2.54mm/180 [mm]
  rect 1.8x2.5 hole 1: 1(0,0)
  oval 1.8x2.5 hole 1: 2(2.54,0) 3(5.08,0)
  silkscreen extent -2.45,-3.4 7.45,2.35, body extent -2.45,-3.4 7.45,2.35, height 7

## Part data
C1 C3 C4 C6 C7 C8 C9 C10 C14 C15 C19 C29 C30 C32 C35 C45 C46 C50 C60 C61 C63 C66 C76 C77 C78 C80 C82 C87 C92 C97 C98 C99 C103 C106 C109 C112 C113 C115: library part CAP, "CC0603KRX7R9BB104"
C2 C18 C33 C34 C49 C64 C65 C81 C83 C84 C85 C86 C89 C90 C93 C94 C95 C96 C100 C101 C102 C104 C105 C107 C108 C110 C111: library part CAP, "CC0603KRX7R9BB105"
C5 C114: library part CAP, "CC0603MRX5R8BB106"
C11 C12: library part CAP, "CC0603FRNPO9BN160"
C13: library part CAP, "CC0603KRX7R9BB102"
C16 C47: library part CAP, "CC0603KRX7R9BB151"
C20 C21 C22 C36 C37 C38 C51 C52 C53 C67 C68 C69: library part CAP, "CC1206KKX5R9BB106"
C26 C27 C28 C42 C43 C44 C57 C58 C59 C73 C74 C75 C91: library part CAP, "CC1206KKX7R0BB104"
C31 C62: library part CAP, "CC1206KRX7R9BB103"
C79 C88: library part CAP, "CC0603FRNPO9BN470"
D1: library part HFBR_XX21Z_UNION, "Versatile Link Fiber-Optic Connection"
D2: library part "DIODE SCHOTTKY"
D3 D4 D5 D6: library part LED, "No Description Available", Manufacturer_Name="ams OSRAM", Manufacturer_Part_Number=LSQ976, Copyright="Copyright (C) 2025 Ultra Librarian. All rights reserved."
D7 D10: library part "DIODE SCHOTTKY", "1.1V@1.0A，耐压1.6kV，trr=70ns"
D8 D9 D11 D12 D15: library part TVS, "单向瞬态抑制二极管"
D13: library part "DIODE SCHOTTKY", "肖特基二极管"
EC1 EC2 EC3 EC4 EC5 EC6 EC7 EC8: library part SMD_ECAP, "470uF@25V， Iripple = 4.1A"
EC9 EC10 EC11: library part SMD_ECAP, "22uF@50V， Iripple = 2.65A"
F1: library part FUSE
FB1: library part 磁珠_1, "PZ1608D201-1R0TF"
J2: "KF128L-3.81-2P"
L1 L2 L3: "1.2A", DC Resistance (DCR)=125mΩ, JLCPCB Part Class="Extended Part", LCSC Part Name="10uH ±20% 3.5A", Manufacturer=cjiang(长江微电), Manufacturer Part=FXL0530-100-M, Rated Current=3.2A, Saturation Current (Isat)=3.5A, Tolerance=±20%, Add into BOM=yes, Convert to PCB=yes, Datasheet=https://atta.szlcsc.com/upload/public/pdf/source/20240426/3189EA8206330E2108542F9E34E540E7.pdf, Device=FXL0530-100-M, Supplier=LCSC, Supplier Footprint=SMD,5.2x5.4mm, Supplier Part=C177248, Symbol=FXL0530-100-M, Type=一体成型电感
L4: library part FXL0530-100-M, DC Resistance (DCR)=125mΩ, JLCPCB Part Class="Extended Part", LCSC Part Name="10uH ±20% 3.5A", Manufacturer=cjiang(长江微电), Rated Current=3.2A, Saturation Current (Isat)=3.5A, Tolerance=±20%, Add into BOM=yes, Convert to PCB=yes, Datasheet=https://atta.szlcsc.com/upload/public/pdf/source/20240426/3189EA8206330E2108542F9E34E540E7.pdf, Device=FXL0530-100-M, Manufacturer Part=FXL0530-100-M, Supplier=LCSC, Supplier Footprint=SMD,5.2x5.4mm, Supplier Part=C177248, Symbol=FXL0530-100-M, Type=一体成型电感
M1 M2: library part QAxx3H-R3, "IN=24VDC, OUT=+15VDC/-9VDC"
Q1: library part NMOS
Q2 Q6: "No Description Available", Manufacturer_Name=Nexperia, Manufacturer_Part_Number=PHPT60410NYX, Copyright="Copyright (C) 2025 Ultra Librarian. All rights reserved.", RefDes=RefDes, Type=Transistors
Q3: "IGBT Module"
Q4 Q5 Q7 Q8: "No Description Available", Manufacturer_Name=Nexperia, Copyright="Copyright (C) 2025 Ultra Librarian. All rights reserved.", Manufacturer_Part_Number=PHPT60415PYX, RefDes=RefDes, Type=Transistors
Q9 Q10: library part MOS-3P
R1 R2 R5 R10 R11 R12 R27 R28 R29 R47 R48 R49 R50 R51: library part RES, "RC0603FR-074K7L"
R3: library part RES, "RP0603BRD0725RL"
R4: library part RES
R6 R7 R8 R9: library part RES, "RC0603FR-07150RL"
R13 R14 R16 R19 R20 R21 R30 R31 R33 R36 R37 R38: library part RES, "RC1206FR-079R1L"
R15 R18 R25 R26 R32 R35 R42 R43: library part RES, "RC1206FR-07130RL"
R17 R34: library part RES, "RC1206FR-07100RL"
R22 R24 R39 R41: library part RES, "RC1206FR-0710KL"
R23 R40: library part RES, "RC1206FR-0715RL"
R44 R45: library part RES, "RC0603FR-0751RL"
R46: library part RES, "RT0603BRD071KL"
R52: library part RES, "RC0603FR-0768KL"
R53: library part RES, "RT0603BRD0715KL"
R54: library part RES, "RC0603FR-07470KL"
R55: library part RES, "RC0603FR-070RL"
TP1 TP2: library part TP
U1: "Mainstream Mixed signals MCUs Arm Cortex-M4 core with DSP and FPU, 64 Kbytes of Flash memory, 72 MHz CPU, 12-bit ADC 5 MSPS, Comparator, Op-Amp", Manufacturer_Name=STMicroelectronics, Copyright="Copyright (C) 2025 Ultra Librarian. All rights reserved.", Datasheet=https://www.st.com/resource/en/datasheet/stm32f302r6.pdf, Manufacturer_Part_Number=STM32F302C8T6, RefDes=RefDes, Type=Type
U2: "Y=A\"
U3 U4: "Driver IC"
U5: "轨到轨运算放大器"
U6: "DC/DC converter controller"
X1: "无源晶振"

## Via types
v1: diameter 20, hole 10, TOP to BOTTOM, tented both sides, 350 vias

## Nets (pads, with @x,y where several pads share a name; then routed paths per layer and width w, separated by ;. In a path a pad name is that pad's centre, name@x,y a point inside that pad or via, vN(x,y) a via of type N, cw(c..) or ccw(c..) an arc to the next point about the centre after c; other vN are vias at no path point)
3V3: C1.1 C2.2 C3.1 C4.1 C5.1 C6.1 C7.1 C8.1 C9.1 C14.1 C15.1 C45.1 C46.1 C88.1 C99.1 C100.1 C113.1 D1.3 D1.5 D2.K EC11.1 FB1.1 J1.1 J1.2 L4.2 R2.1 R6.1 R7.1 R8.1 R9.1 R10.2 R11.2 R27.2 R28.2 R44.1 R45.1 R52.1 U1.1 U1.24 U1.36 U1.48 U2.5 U3.3 U4.3 | length 2997.9
  TOP w8: U4.3@-423.57,-2247.97 -406.87,-2264.67 -406.87,-2296.53 C46.1@-368.79,-2334.61 C45.1@-326.36,-2377.04 v1(-296.29,-2407.11) ; U1.36@-167.32,-2682.27 v1(-128.98,-2682.27) ; v1(-108.27,-2445.02) U1.24@-108.27,-2406.68 ; U1.48@108.27,-2741.32 v1(108.27,-2702.98) ; v1(128.98,-2682.27) U1.1@167.32,-2682.27 ; v1(158.36,-2269.18) C15.1@188.43,-2239.1 268.94,-2158.6 300.8,-2158.6 U3.3@317.5,-2141.9
  TOP w20: v1(-1261.62,-3066.32) -1241.62,-3046.32 R9.1@-1213.43,-3046.32 R6.1@-1035.18,-3046.32 R7.1@-946.06,-3046.32
  BOTTOM w8: D2.K@-268.6,-3067.74 -268.6,-3063.8 -290.6,-3041.8 D1.5@-290.6,-2953.63 C4.1@-290.6,-2844.36 C5.1@-240.17,-2844.36 ; v1(-207,-2331) v1(-207,-2331) R27.2@-241.52,-2296.42 R28.2@-198.34,-2253.24 ; v1(-128.98,-2682.27) C6.1@-128.98,-2632.27 -100.27,-2632.27 -93.8,-2625.8 R2.1@-51,-2625.8 ; v1(-108.27,-2445.02) C9.1@-68.27,-2445.02 ; D1.3@-88.99,-2953.63 -88.69,-2953.93 -88.69,-3029.84 -66.46,-3052.08 C1.1@-66.46,-3073.74 C2.2@-66.46,-3125.74 ; C7.1@69.98,-2632.27 69.98,-2664.69 v1(108.27,-2702.98) ; FB1.1@102,-1868 C113.1@161,-1868 v1(234,-1868) ; v1(128.98,-2682.27) C8.1@128.98,-2632.27 ; C88.1@230,-3280.99 R52.1@290.71,-3280.99 650.01,-3280.99 870.69,-3060.31 v1(939.65,-3060.31) ; v1@233,-3018 v1(233.21,-3018) C3.1@266.61,-2984.61 U2.5@266.61,-2932.8 ; v1(234.47,-2358.47) R10.2@269.05,-2323.95 R11.2@312.23,-2367.13 ; v1(264.61,-2756.61) R44.1@264.61,-2720 ; v1(443.61,-2756.61) R45.1@443.61,-2720
  other v1: 977.65,-3060.31 1015.65,-3060.31 939.65,-3022.31 977.65,-3022.31 1015.65,-3022.31 939.65,-2984.31 977.65,-2984.31 1015.65,-2984.31
24V: C80.2 C81.1 C82.2 C83.1 C89.1 C90.1 C91.1 C92.2 C93.1 EC9.1 EC10.1 L1.4 L2.2 L3.1 R54.1 U6.1 | length 3340.6
  TOP w8: R54.1@229,-3059.41 197.59,-3059.41 171,-3086 171,-3275 212.46,-3316.46 342.54,-3316.46 C90.1@380,-3279
  TOP w30: v1(1156.28,-3112.8) EC10.1@1156.28,-3009.45
  POWER w20: 451,-3246 451,-3137.42 ; 679.22,-3093.22 v1(679.22,-2916.46)
  POWER w30: v1(-678,-3070) -610.67,-3137.33 451.09,-3137.33 ; v1(432,-3246) 451,-3246 v1(470,-3246) ; 451,-3137.42 451.09,-3137.33 ; v1(1095.91,-2984.31) v1(1095.91,-3060.31) 1063,-3093.22 679.22,-3093.22 635.11,-3137.33 451.09,-3137.33
  BOTTOM w20: v1@-678.26,-3070 C93.1@-678.26,-3039.28 C92.2@-678.26,-2989.28 -678.26,-2958.03 -673.52,-2953.29 L3.1@-673.52,-2929.67 ; L2.2@674.22,-2776.13 674.22,-2799.75 678.96,-2804.49 C83.1@678.96,-2835.74 C82.2@678.96,-2885.74 v1@678.96,-2916.46 ; C81.1@964,-3189.21 C80.2@1014,-3189.21 1016.79,-3186.42 L1.4@1076.01,-3186.42
  BOTTOM w30: L1.4@1078.8,-3183.63 1085.3,-3183.63 v1@1156.13,-3112.8
  other v1: 1095.91,-3022.31
+15V_DN: C49.2 C50.1 C51.2 C52.2 C53.2 C57.2 C58.2 C59.2 C107.1 C108.1 C109.2 EC5.1 EC6.1 M2.10 Q6.5 U4.12 | length 2930.6
  TOP w20: v1(-738.57,-1787.75) -708.3,-1818.02 C49.2@-708.05,-1818.27 ; C49.2@-708.45,-1818.17 C50.1@-666.03,-1860.6 ; C50.1@-665.88,-1860.45 -632.64,-1893.68 -632.64,-1897.47 U4.12@-615.94,-1914.18
  POWER w60: M2.10@-1556.48,-2682.89 -1556.48,-2531.48 ; -1556.48,-2522.68 -1556.48,-2492.11 -1449,-2384.63 -1329.22,-2384.63 v1(-1180.96,-2236.37) v1(-1180.96,-2122.04) v1(-1180.96,-2007.7) v1(-1180.96,-1893.37) -759.48,-1471.89 -759.48,-1082.61 v1(-797.44,-1044.64)
  BOTTOM w30: M2.10@-1556.48,-2682.89 C109.2@-1556.48,-2598.55 C107.1@-1556.48,-2539.91 C108.1@-1556.48,-2481.28 ; v1(-1180.96,-1893.37) -1180.96,-1859.59 -1109.12,-1787.75 v1(-738.57,-1787.75)
  other v1: -882.04,-1044.64 -882.04,-1005.27 -797.44,-1005.27 -882.04,-965.9 -797.44,-965.9 -882.04,-926.53 -797.44,-926.53 -882.04,-887.16 -797.44,-887.16 -882.04,-847.79 -797.44,-847.79
+15V_UP: C18.2 C19.1 C20.2 C21.2 C22.2 C26.2 C27.2 C28.2 C101.1 C102.1 C103.2 EC1.1 EC2.1 M1.10 Q2.5 U3.12 | length 3125.1
  TOP w20: U3.12@651.29,-1949.53 701.38,-1899.44 C19.1@704.87,-1899.44 C18.2@747.3,-1857.02 ; C18.2@747.05,-1857.57 C18.2@747.2,-1857.42 v1(777.72,-1826.9)
  POWER w60: v1(1241.22,-1044.65) 1279.19,-1082.61 1279.19,-1438.56 v1(1734,-1893.37) v1(1734,-2122.04) v1(1734,-2236.37) 1734,-2282.59 1557.48,-2459.11 M1.10@1557.48,-2529.35
  BOTTOM w30: v1(777.72,-1826.9) 1667.53,-1826.9 v1(1734,-1893.37) ; M1.10@1557.48,-2529.35 C103.2@1557.48,-2386.37 C101.1@1557.48,-2327.74
  other v1: 1734,-2007.7 1156.63,-1044.65 1156.63,-1005.28 1241.22,-1005.28 1156.63,-965.91 1241.22,-965.91 1156.63,-926.54 1241.22,-926.54 1156.63,-887.17 1241.22,-887.17 1156.63,-847.8 1241.22,-847.8
-9V_DN: C63.1 C64.2 C65.2 C66.1 C67.2 C68.2 C69.2 C73.2 C74.2 C75.2 C110.1 C111.1 C112.2 EC7.1 EC8.1 M2.8 Q7.5 Q8.5 R40.1 U4.9 U4.16 | length 4721.4
  TOP w20: v1(-882.93,-1929.72) C65.2@-852.42,-1960.24 C66.1@-809.99,-2002.67 ; C66.1@-803.32,-2009.64 U4.16@-757.36,-2055.6 ; v1(-628.37,-1689.31) C64.2@-597.86,-1719.82 C63.1@-555.43,-1762.25 ; C63.1@-555.83,-1762.15 U4.9@-509.87,-1808.11
  TOP w30: v1(-1515.91,-847.15) R40.1@-1515.91,-799.69
  POWER w30: v1(-882.93,-1929.72) -776.14,-1929.72 -628.37,-1781.96 v1(-628.37,-1689.31)
  POWER w60: M2.8@-1356.48,-2682.89 -1356.48,-2761.85 -1391.63,-2797 -1603,-2797 -1734,-2666 v1(-1734,-1893.37) -1346.21,-1505.58 -1346.21,-1127.88 -1262.98,-1044.64 v1(-1241.22,-1044.64)
  BOTTOM w30: v1(-1734,-1893.37) -1734,-1758.63 -1572.37,-1597 -689,-1597 -628.37,-1657.63 v1(-628.37,-1689.31) ; M2.8@-1356.48,-2682.89 C112.2@-1356.48,-2598.55 C111.1@-1356.48,-2539.91 C110.1@-1356.48,-2481.28
  other v1: -1734,-2236.37 -1734,-2122.04 -1734,-2007.7 -1156.63,-1044.64 -1241.22,-1005.27 -1156.63,-1005.27 -1515.91,-965.26 -1241.22,-965.9 -1156.63,-965.9 -1241.22,-926.53 -1156.63,-926.53 -1580.5,-925.89 -1515.91,-925.89 -1241.22,-887.16 -1156.63,-887.16 -1580.5,-886.52 -1515.91,-886.52 -1580.5,-847.15 -1241.22,-847.79 -1156.63,-847.79
-9V_UP: C32.1 C33.2 C34.2 C35.1 C36.2 C37.2 C38.2 C42.2 C43.2 C44.2 C104.1 C105.1 C106.2 EC3.1 EC4.1 M1.8 Q4.5 Q5.5 R23.1 U3.9 U3.16 | length 3610.1
  TOP w20: U3.16@509.87,-1808.11 C32.1@555.83,-1762.15 ; C32.1@562.8,-1755.48 C33.2@605.23,-1713.05 v1(635.75,-1682.54) ; U3.9@757.36,-2055.6 C35.1@803.32,-2009.64 ; C35.1@810.29,-2002.97 C34.2@852.72,-1960.54 v1(883.23,-1930.02)
  TOP w30: EC3.1@1082.84,-2240.47 EC3.1@1082.84,-2236.37 ; R23.1@1515.11,-798.89 R23.1@1515.91,-799.69
  POWER w30: v1(635.75,-1682.54) 742.54,-1682.54 883.23,-1823.23 v1(883.23,-1930.02)
  POWER w60: v1(882.04,-1044.65) 920,-1082.61 920,-1632.41 v1(1180.96,-1893.37) v1(1180.96,-2007.7) v1(1180.96,-2122.04) v1(1180.96,-2236.37) 1180.96,-2282.59 1357.48,-2459.11 1357.48,-2528.93 1357.9,-2529.35 M1.8@1357.9,-2529.76 ; 937.44,-778.56 1079,-637 1339,-637 1479.77,-777.77
  BOTTOM w30: v1(883.23,-1930.02) 919.89,-1893.37 v1(1180.96,-1893.37) ; M1.8@1357.48,-2529.35 C106.2@1357.48,-2445 C104.1@1357.48,-2386.37 C105.1@1357.48,-2327.74
  other v1: 797.44,-1044.65 797.44,-1005.28 882.04,-1005.28 797.44,-965.91 882.04,-965.91 1515.91,-965.26 797.44,-926.54 882.04,-926.54 1515.91,-925.89 1580.5,-925.89 797.44,-887.17 882.04,-887.17 1515.91,-886.52 1580.5,-886.52 797.44,-847.8 882.04,-847.8 1515.91,-847.15 1580.5,-847.15
A3V3: C10.1 C76.2 C77.1 C114.1 C115.1 FB1.2 R46.2 U1.9 U5.5 XH1.1 XH2.1 XH3.1 XH4.1 | length 2677.7
  TOP w8: v1(-201,-1870) C77.1@-201,-1899 R46.2@-140,-1899 ; v1(2.8,-2091.6) U5.5@2.8,-2052.6 C76.2@2.8,-1991 ; v1(108.98,-2498) 135.77,-2524.79 U1.9@167.32,-2524.79
  POWER w8: -28,-2089.9 -26.3,-2091.6 v1(2.8,-2091.6)
  POWER w20: XH4.1@-299.98,-1714 XH2.1@-299.98,-1446 -299.98,-1432.22 -233.76,-1366 33.8,-1366 XH3.1@100.02,-1432.22 ; v1(-28,-1833) -28,-2089.9 -28,-2361.02 v1(108.98,-2498) ; XH1.1@74.77,-1753.03 100.02,-1727.78 XH3.1@100.02,-1446
  BOTTOM w8: C10.1@14.98,-2518 44.98,-2488 98.29,-2488 108.29,-2498 v1(108.98,-2498)
  BOTTOM w20: XH4.1@-299.98,-1714 -299.98,-1792.02 -222,-1870 v1(-201,-1870) C114.1@-53,-1870 -54,-1869 -54,-1850 -37,-1833 v1(-28,-1833) ; C114.1@-42,-1869 C115.1@-2,-1869 FB1.2@47,-1869
ADC1_IN1: U1.10 XH1.2 | length 906.8
  TOP w8: U1.10@167.32,-2505.1 169.32,-2503.1 193.39,-2503.1 205,-2491.5 205,-2452 156,-2403 156,-2339.4 98.68,-2282.08 98.68,-1976.32 200.02,-1874.98 XH1.2@200.02,-1714
ADC1_IN2: U1.11 XH2.2 | length 1208.4
  TOP w8: XH2.2@-199.98,-1446 -199.98,-1459.78 -6,-1653.76 -6,-1906.8 69.36,-1982.16 69.36,-2292.36 128,-2351 128,-2470.05 141.37,-2483.42 165.32,-2483.42 U1.11@167.32,-2485.42 U1.11@169.32,-2483.42
ADC1_IN3: U1.12 XH3.2 | length 1175.5
  TOP w8: U1.12@167.32,-2465.73 149.82,-2465.73 142,-2457.91 142,-2345.2 84.68,-2287.88 84.68,-1977.68 8,-1901 8,-1651.8 200.02,-1459.78 XH3.2@200.02,-1446
ADC1_IN4: C79.2 R47.2 U1.13 | length 329.4
  TOP w8: R47.2@-60.19,-2191 -60.19,-2194.25 -48.44,-2206 -45.19,-2206 -13.19,-2238 -12,-2238 C79.2@-1,-2249 v1(27,-2249) ; v1(97.06,-2357.47) 108.27,-2368.69 U1.13@108.27,-2406.68 U1.13@108,-2406.41
  POWER w8: v1(27,-2249) 69,-2249 97.06,-2277.05 v1(97.06,-2357.47)
AGND: C10.2 C76.1 C77.2 C78.1 C79.1 C114.2 C115.2 Q3.6 R55.2 U1.8 U5.2 XH1.3 XH2.3 XH3.3 XH4.3 | length 11273.4
  TOP w8: v1(-201,-1993) C77.2@-201,-1954 ; C78.1@-141,-2079 -141,-2161 v1(-140,-2162) ; v1(-99.98,-2211) -99.98,-2231.02 -84,-2247 -58,-2247 C79.1@-56,-2249 ; v1(-99.98,-1990) -53.2,-1990 C76.1@-52.2,-1991 -52.2,-2066.2 -76,-2090 U5.2@-96.8,-2090 ; v1(123.98,-2544.47) U1.8@167.32,-2544.47
  GND w20: XH4.3@-99.98,-1714 -99.98,-1432.22 -33.76,-1366 233.8,-1366 XH3.3@300.02,-1432.22 ; XH1.3@300.02,-1714 XH3.3@300.02,-1446
  POWER w8: Q3.6@-1437.01,3070.87 -1761.65,2746.22 -1761.65,-1208.17 -1761.65,-1232.77 -1915.5,-1386.61 -1915.5,-2868.3 -1759.3,-3024.5 -1046.5,-3024.5 -830,-2808 -830,-2572 -679,-2421 -366,-2421 -140,-2195 v1(-140,-2162) -101.25,-2162 -99.98,-2160.73 ; v1(-201,-1993) -199.5,-1991.5 -101.48,-1991.5 v1(-99.98,-1990)
  POWER w20: XH4.3@-99.98,-1714 v1(-99.98,-1990) -99.98,-2160.73 v1(-99.98,-2211) -99.98,-2402.02 42.47,-2544.47 v1(123.98,-2544.47)
  BOTTOM w8: C10.2@69.98,-2518 97.51,-2518 v1(123.98,-2544.47)
  BOTTOM w20: v1(-201,-1993) v1@-199.5,-1991.5 ; -85.5,-1991.5 -84,-1990 -84,-1956 C114.2@-53,-1925 -3,-1925 C115.2@-2,-1924 R55.2@47,-1924
COMP4_O: TP1.1 U1.19 | length 117.5
  TOP w8: U1.19@-9.84,-2406.68 -9.84,-2332.84 TP1.1@21,-2302
COMP4_P: U1.18 U1.22 XH4.2 | length 971.1
  TOP w8: XH4.2@-199.98,-1714 -199.98,-1732.92 54.04,-1986.94 54.04,-2313.15 9.84,-2357.35 9.84,-2438.9 -4.26,-2453 -54.8,-2453 -68.9,-2438.9 U1.22@-68.9,-2406.68
COMP6_O: TP2.1 U1.31 | length 120.5
  TOP w8: TP2.1@-282,-2598 -242,-2598 -227.84,-2583.84 U1.31@-167.32,-2583.84
DESAT_DN: C47.2 R29.2 U4.14 | length 2749.5
  TOP w15: v1(-1110,-1533.63) -1110,-1643.03 -813.55,-1939.48 C47.2@-751.48,-1939.48 -722.78,-1968.19 -703.35,-1968.19 U4.14@-686.65,-1984.89 ; v1(-777,231) R29.2@-777,354.93
  POWER w15: v1(-1110,-1533.63) -1110,-1115 -1017,-1022 -1017,-649 -718.26,-350.26 -718.26,172.26 v1(-777,231)
DESAT_UP: C16.2 R12.2 U3.14 | length 2315.1
  TOP w15: U3.14@580.58,-1878.82 597.28,-1862.12 597.28,-1842.69 C16.2@625.99,-1813.99 625.99,-1751.92 718,-1659.91 v1(718,-1452) ; v1(777,231) R12.2@777,354.93
  POWER w15: v1(718,-1452) 718.26,-1451.74 718.26,172.26 v1(777,231)
DN_DRI: R49.2 U1.33 | length 841.9
  TOP w8: U1.33@-167.32,-2623.21 -109.79,-2623.21 -36.76,-2696.24 v1(-13,-2696.24)
  POWER w8: v1(-13,-2696.24) 123.67,-2832.91 356.91,-2832.91 v1(490,-2966)
  BOTTOM w8: v1(490,-2966) R49.2@532.59,-2966
DN_FLT: C61.2 R28.1 U1.28 U4.6 | length 666
  TOP w8: U4.6@-317.5,-2141.9 -284.27,-2175.13 -276.45,-2175.13 v1(-267.56,-2184.02) C61.2@-242.88,-2208.7 ; v1(-216.53,-2536) -205.31,-2524.79 U1.28@-167.32,-2524.79
  BOTTOM w8: R28.1@-242.88,-2208.7 v1(-267.56,-2184.02) -298.67,-2184.02 -345,-2230.34 -345,-2440.8 -263.85,-2521.94 -230.58,-2521.94 v1(-216.53,-2536)
DN_RDY: C60.2 R27.1 U1.27 U4.5 | length 554.4
  TOP w8: U4.5@-352.86,-2177.25 -319.62,-2210.49 -319.62,-2218.31 v1(-310.74,-2227.2) C60.2@-286.06,-2251.88 ; v1(-216.53,-2493.89) -205.31,-2505.1 U1.27@-167.32,-2505.1
  BOTTOM w8: R27.1@-286.06,-2251.88 v1(-310.74,-2227.2) -329,-2245.46 -329,-2437 -260.06,-2505.94 -228.58,-2505.94 v1(-216.53,-2493.89)
DRI1: Q10.2 R45.2 U3.7 U4.8 | length 1512.6
  TOP w8: U4.8@-246.79,-2071.19 v1(-204.49,-2113.49) ; v1(416.62,-2325.62) U3.7@458.93,-2283.32
  BOTTOM w8: v1(-204.49,-2113.49) -204.49,-2161.57 51.94,-2418 324.25,-2418 v1(416.62,-2325.62) 482.62,-2325.62 563.59,-2406.59 Q10.2@563.59,-2740.03 561.57,-2738 541,-2738 523,-2720 R45.2@506.6,-2720
DRI2: Q9.2 R44.2 U3.8 U4.7 | length 1609.8
  TOP w8: U4.7@-282.15,-2106.54 v1(-236.88,-2151.81) ; v1(449.02,-2363.94) U3.8@494.28,-2318.68
  BOTTOM w8: v1(-236.88,-2151.81) 45.31,-2434 335,-2434 405.06,-2363.94 v1(449.02,-2363.94) 500.34,-2363.94 549.59,-2413.19 549.59,-2656.41 521,-2685 404,-2685 385,-2704 385,-2739.62 Q9.2@384.59,-2740.03 382.57,-2738 362,-2738 344,-2720 ; R44.2@312.6,-2720 R44.2@329,-2720